# EAGLE board picoKey_230406 (EAGLE 9.6.2)
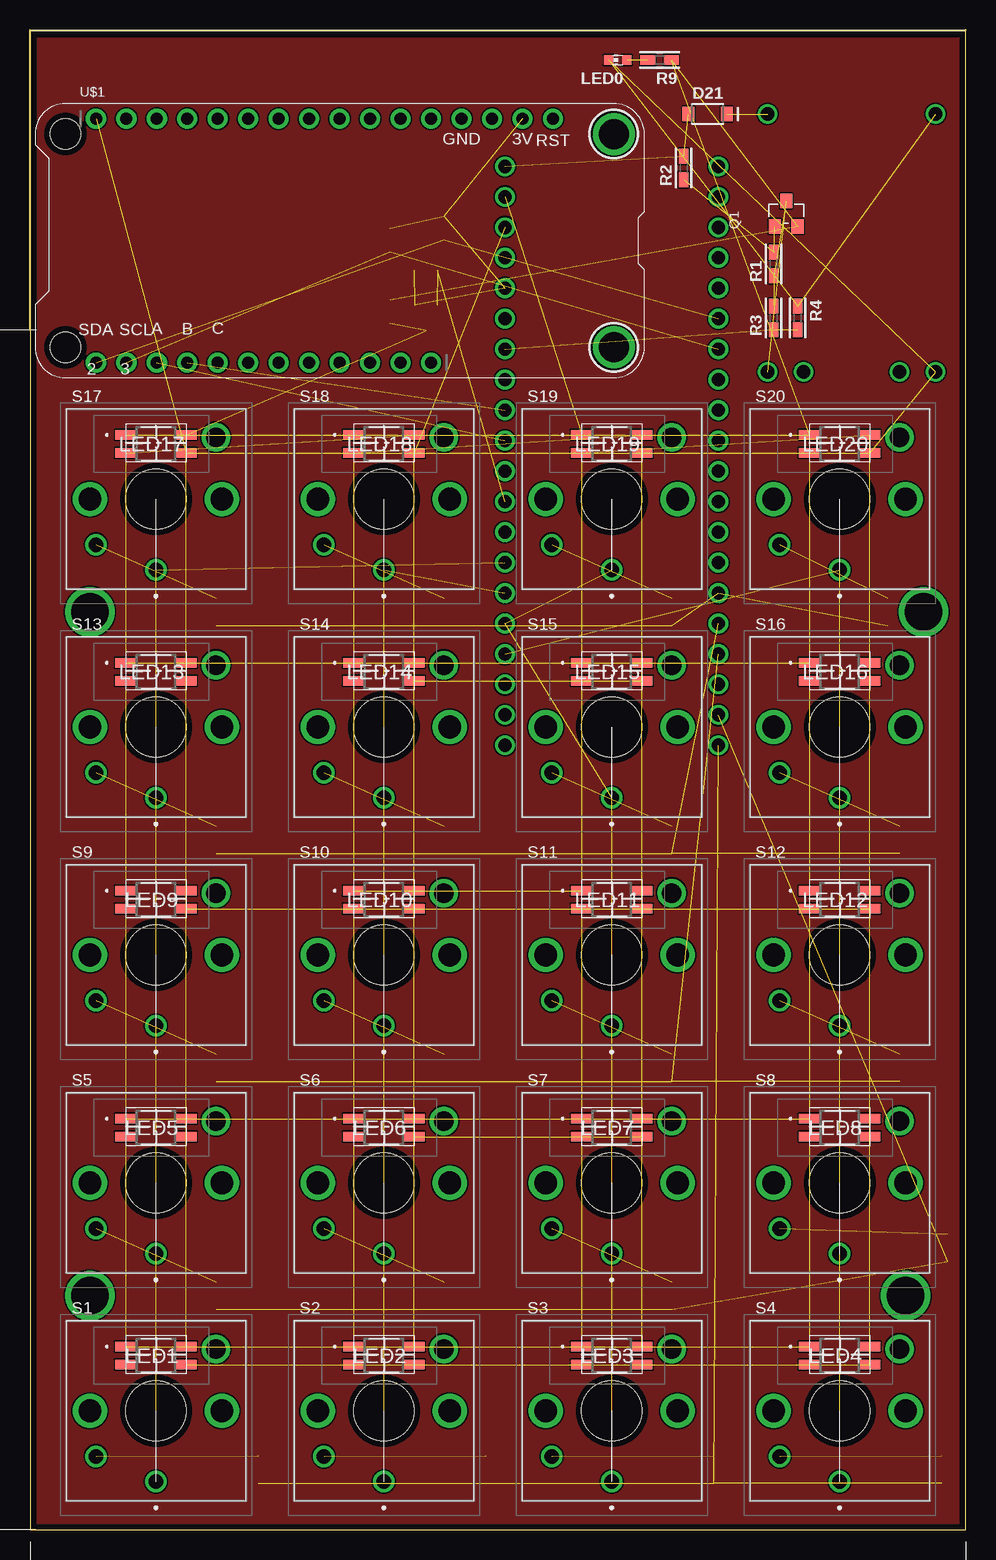
[diagram p0: board, top side]
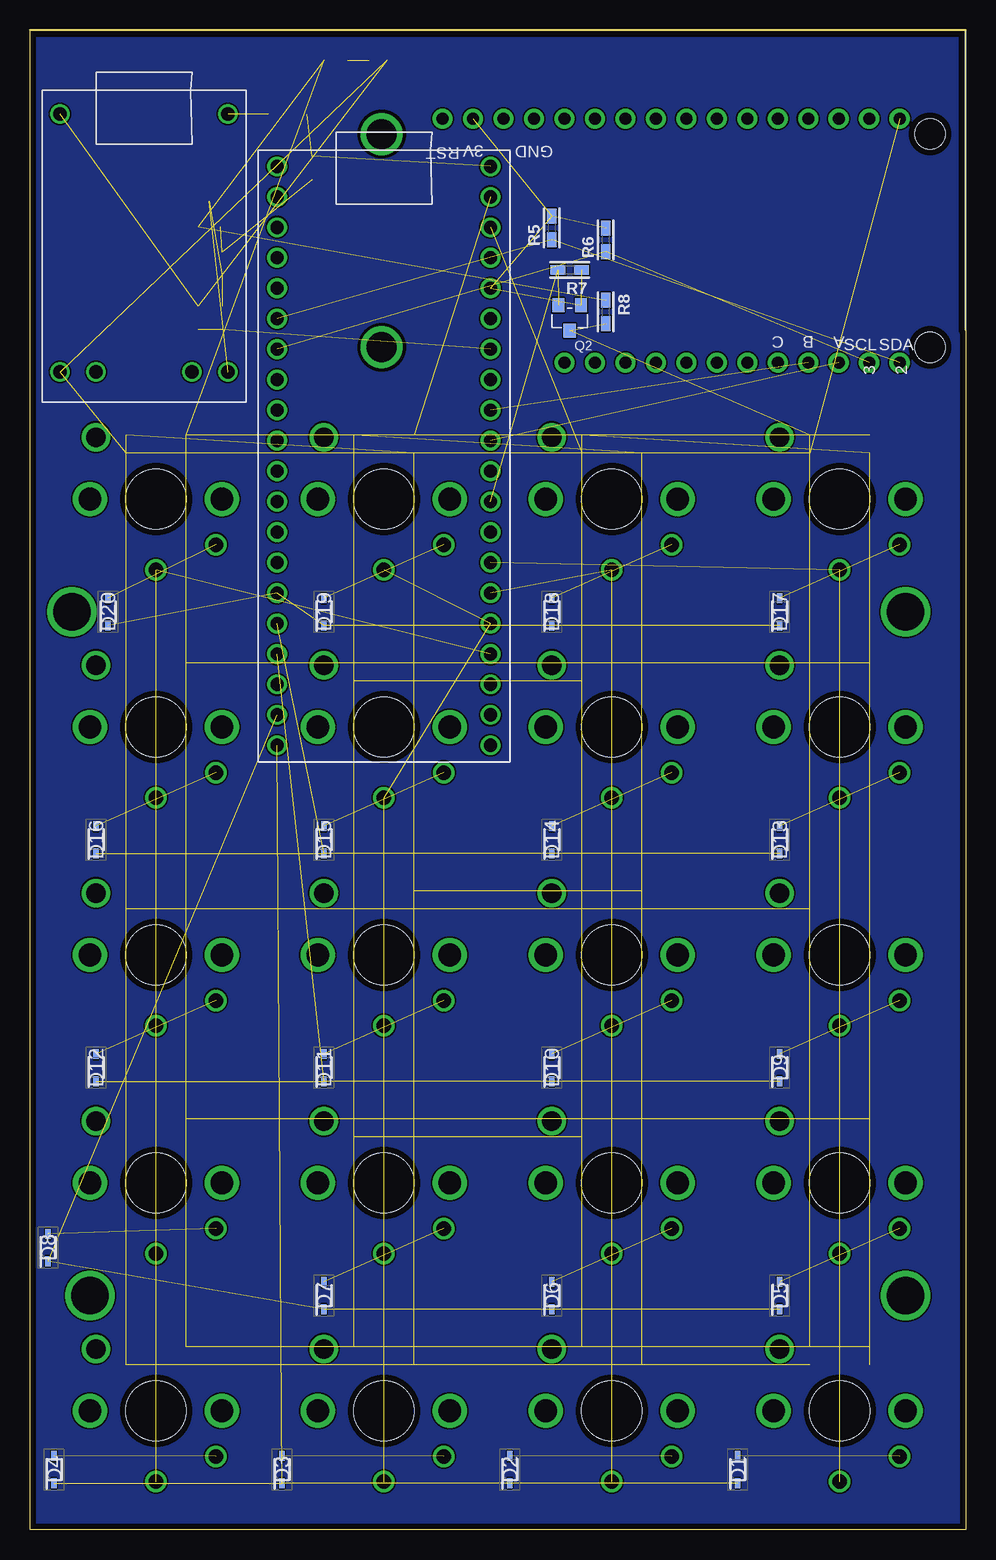
[diagram p1: board, bottom side, seen from below]

Size 78 x 125 mm. Coordinates in mm from the lower left corner, seen from the top.
Outline: 0,0 78,0 78,125 0,125 0,100 0,0
Copper layers (1*16): Top 0.035mm / dielectric 1.53mm / Bottom 0.035mm
Design rules "pban_5mil-l2": minimum track width 5mil, minimum drill 0.3mm, track to track 5mil, track to pad 0.229mm, pad to pad 5mil, via to via 5mil, smd to smd 5mil, copper to edge 0.5mm, drill to drill 0.5mm, minimum pad ring 0.15mm, minimum via ring 0.15mm, stop-mask expansion 4mil, vias tented up to drill 0.35mm, thermal gap 10mil

## Footprints (pad centres in the part's own frame; a part is rotated, then mirrored left to right if it is on the bottom)
SODFL2512X90N = smd 0.82 x 0.42: 1 -1.15,0; 2 1.15,0
SOD-123 = smd 1.2 x 1: A 0,-1.6; K 0,1.6
CHIP-LED0603 = smd 0.8 x 0.8: A 0,-0.75; C 0,0.75
SK6812MINIE = smd 1.8 x 0.82: 1 -2.5,0.75; 2 -2.5,-0.75; 3 2.5,-0.75; 4 2.5,0.75
SOT-23 = smd 1.016 x 1.2: 1 0.95,-1.06; 2 0,1.06; 3 -0.95,-1.06
R0603 = smd 1.25 x 0.8: 1 -0.965,0; 2 0.965,0
KAILH_CHOC_V2 = drill 1.2: 1 0,0; 2 -5,2.1 | drill 1.6: MH1 5,11.05 | drill 1.9: MH2 5.5,5.9; MH3 -5.5,5.9 | hole 5: 0,5.9
CHG-4056 = drill 1.1 pad 1.6: BAT+ 4,-10.5; BAT- -4,-10.5; IN+ 7,11; IN- -7,11; OUT+ 7,-10.5; OUT- -7,-10.5
FEATHER_WING_OLED = drill 1 pad 1.676: 1 0,0; 2 -2.54,0; 3 -5.08,0; 4 -7.62,0; 5 -10.16,0; 6 -12.7,0; 7 -15.24,0; 8 -17.78,0; 9 -20.32,0; 10 -22.86,0; 11 -25.4,0; 12 -27.94,0; 13 -30.48,0; 14 -33.02,0; 15 -35.56,0; 16 -38.1,0; 17 -27.94,20.32; 18 -25.4,20.32; 19 -22.86,20.32; 20 -20.32,20.32; 21 -17.78,20.32; 22 -15.24,20.32; 23 -12.7,20.32; 24 -10.16,20.32; 25 -7.62,20.32; 26 -5.08,20.32; 27 -2.54,20.32; 28 0,20.32 | drill 2.5 pad 3.2: P$1 -43.18,19.05; P$2 -43.18,1.27 | hole 2.54: 2.54,19.05; 2.54,1.27
RASPBERRYPI_PICO_RPI_PICO_MY = drill 1.1 pad 1.6: 3V3 8.89,13.97; 3V3_EN 8.89,16.51; ADC_VREF 8.89,11.43; AGND 8.89,6.35; GND@1 -8.89,19.05; GND@2 -8.89,6.35; GND@3 -8.89,-6.35; GND@4 -8.89,-19.05; GND@6 8.89,-19.05; GND@7 8.89,-6.35; GND@8 8.89,19.05; GP0 -8.89,24.13; GP1 -8.89,21.59; GP2 -8.89,16.51; GP3 -8.89,13.97; GP4 -8.89,11.43; GP5 -8.89,8.89; GP6 -8.89,3.81; GP7 -8.89,1.27; GP8 -8.89,-1.27; GP9 -8.89,-3.81; GP10 -8.89,-8.89; GP11 -8.89,-11.43; GP12 -8.89,-13.97; GP13 -8.89,-16.51; GP14 -8.89,-21.59; GP15 -8.89,-24.13; GP16 8.89,-24.13; GP17 8.89,-21.59; GP18 8.89,-16.51; GP19 8.89,-13.97; GP20 8.89,-11.43; GP21 8.89,-8.89; GP22 8.89,-3.81; GP26_A0 8.89,1.27; GP27_A1 8.89,3.81; GP28_A2 8.89,8.89; RUN 8.89,-1.27; VBUS 8.89,24.13; VSYS 8.89,21.59

## Placement (x,y rotation side)
D1  1N4148WS  [SODFL2512X90N]  19,5 90 bottom
D2  1N4148WS  [SODFL2512X90N]  38,5 90 bottom
D3  1N4148WS  [SODFL2512X90N]  57,5 90 bottom
D4  1N4148WS  [SODFL2512X90N]  76,5 90 bottom
D5  1N4148WS  [SODFL2512X90N]  15.5,19.5 90 bottom
D6  1N4148WS  [SODFL2512X90N]  34.5,19.5 90 bottom
D7  1N4148WS  [SODFL2512X90N]  53.5,19.5 90 bottom
D8  1N4148WS  [SODFL2512X90N]  76.5,23.5 90 bottom
D9  1N4148WS  [SODFL2512X90N]  15.5,38.5 90 bottom
D10  1N4148WS  [SODFL2512X90N]  34.5,38.5 90 bottom
D11  1N4148WS  [SODFL2512X90N]  53.5,38.5 90 bottom
D12  1N4148WS  [SODFL2512X90N]  72.5,38.5 90 bottom
D13  1N4148WS  [SODFL2512X90N]  15.5,57.5 90 bottom
D14  1N4148WS  [SODFL2512X90N]  34.5,57.5 90 bottom
D15  1N4148WS  [SODFL2512X90N]  53.5,57.5 90 bottom
D16  1N4148WS  [SODFL2512X90N]  72.5,57.5 90 bottom
D17  1N4148WS  [SODFL2512X90N]  15.5,76.5 90 bottom
D18  1N4148WS  [SODFL2512X90N]  34.5,76.5 90 bottom
D19  1N4148WS  [SODFL2512X90N]  53.5,76.5 90 bottom
D20  1N4148WS  [SODFL2512X90N]  71.5,76.5 90 bottom
D21  [SOD-123]  56.5,118 270 top
LED0  [CHIP-LED0603]  49,122.5 90 top
LED1  SK6812MINI-E  [SK6812MINIE]  10.5,14.5 0 top
LED2  SK6812MINI-E  [SK6812MINIE]  29.5,14.5 0 top
LED3  SK6812MINI-E  [SK6812MINIE]  48.5,14.5 0 top
LED4  SK6812MINI-E  [SK6812MINIE]  67.5,14.5 0 top
LED5  SK6812MINI-E  [SK6812MINIE]  10.5,33.5 0 top
LED6  SK6812MINI-E  [SK6812MINIE]  29.5,33.5 0 top
LED7  SK6812MINI-E  [SK6812MINIE]  48.5,33.5 0 top
LED8  SK6812MINI-E  [SK6812MINIE]  67.5,33.5 0 top
LED9  SK6812MINI-E  [SK6812MINIE]  10.5,52.5 0 top
LED10  SK6812MINI-E  [SK6812MINIE]  29.5,52.5 0 top
LED11  SK6812MINI-E  [SK6812MINIE]  48.5,52.5 0 top
LED12  SK6812MINI-E  [SK6812MINIE]  67.5,52.5 0 top
LED13  SK6812MINI-E  [SK6812MINIE]  10.5,71.5 0 top
LED14  SK6812MINI-E  [SK6812MINIE]  29.5,71.5 0 top
LED15  SK6812MINI-E  [SK6812MINIE]  48.5,71.5 0 top
LED16  SK6812MINI-E  [SK6812MINIE]  67.5,71.5 0 top
LED17  SK6812MINI-E  [SK6812MINIE]  10.5,90.5 0 top
LED18  SK6812MINI-E  [SK6812MINIE]  29.5,90.5 0 top
LED19  SK6812MINI-E  [SK6812MINIE]  48.5,90.5 0 top
LED20  SK6812MINI-E  [SK6812MINIE]  67.5,90.5 0 top
Q1  [SOT-23]  63.05,109.68 0 top
Q2  [SOT-23]  33,101 180 bottom
R1  100k  [R0603]  62,105.5 90 top
R2  100R  [R0603]  54.5,113.5 90 top
R3  200k  [R0603]  62,101 90 top
R4  100k  [R0603]  64,101 270 top
R5  4.7k  [R0603]  34.5,108.5 90 bottom
R6  4.7k  [R0603]  30,107.5 90 bottom
R7  100k  [R0603]  33,105 180 bottom
R8  100k  [R0603]  30,101.5 270 bottom
R9  1k  [R0603]  52.5,122.5 180 top
S1  CPG135001D02V2  [KAILH_CHOC_V2]  10.5,4 0 top
S2  CPG135001D02V2  [KAILH_CHOC_V2]  29.5,4 0 top
S3  CPG135001D02V2  [KAILH_CHOC_V2]  48.5,4 0 top
S4  CPG135001D02V2  [KAILH_CHOC_V2]  67.5,4 0 top
S5  CPG135001D02V2  [KAILH_CHOC_V2]  10.5,23 0 top
S6  CPG135001D02V2  [KAILH_CHOC_V2]  29.5,23 0 top
S7  CPG135001D02V2  [KAILH_CHOC_V2]  48.5,23 0 top
S8  CPG135001D02V2  [KAILH_CHOC_V2]  67.5,23 0 top
S9  CPG135001D02V2  [KAILH_CHOC_V2]  10.5,42 0 top
S10  CPG135001D02V2  [KAILH_CHOC_V2]  29.5,42 0 top
S11  CPG135001D02V2  [KAILH_CHOC_V2]  48.5,42 0 top
S12  CPG135001D02V2  [KAILH_CHOC_V2]  67.5,42 0 top
S13  CPG135001D02V2  [KAILH_CHOC_V2]  10.5,61 0 top
S14  CPG135001D02V2  [KAILH_CHOC_V2]  29.5,61 0 top
S15  CPG135001D02V2  [KAILH_CHOC_V2]  48.5,61 0 top
S16  CPG135001D02V2  [KAILH_CHOC_V2]  67.5,61 0 top
S17  CPG135001D02V2  [KAILH_CHOC_V2]  10.5,80 0 top
S18  CPG135001D02V2  [KAILH_CHOC_V2]  29.5,80 0 top
S19  CPG135001D02V2  [KAILH_CHOC_V2]  48.5,80 0 top
S20  CPG135001D02V2  [KAILH_CHOC_V2]  67.5,80 0 top
U1  CHG-4056  [CHG-4056]  68.5,107 0 bottom
U$1  FEATHER_WING_OLED  [FEATHER_WING_OLED]  5.5,117.6 180 top
X1  [RASPBERRYPI_PICO_RPI_PICO_MY]  48.5,89.5 0 bottom

## Library data of the parts
D1-D20 = SamacSys_Parts; ARROW_PART_NUMBER: 1N4148WS; ARROW_PRICE-STOCK: https://www.arrow.com/en/products/1n4148ws/on-semiconductor?region=europe; DESCRIPTION: ON Semiconductor Switching Diode, 300mA 75V, 2-Pin SOD-323 1N4148WS; HEIGHT: 0.9mm; MANUFACTURER_NAME: onsemi; MANUFACTURER_PART_NUMBER: 1N4148WS; MOUSER_PART_NUMBER: 512-1N4148WS; MOUSER_PRICE-STOCK: https://www.mouser.co.uk/ProductDetail/onsemi-Fairchild/1N4148WS?qs=2%2FYqgE%252BHg%252BKBrKZlAsMLhw%3D%3D
D21 LED0 Q1 Q2 R1-R9 = Miya_IC
LED1-LED20 = picoKey; DESCRIPTION: 3.2x2.8x1.78 mm 0.2W Intelligent external control surface mount SMD LED (MSL:5a); HEIGHT: 1.88mm; MANUFACTURER_NAME: Yellow Stone Corp.; MANUFACTURER_PART_NUMBER: SK6812MINI-E
S1-S20 U1 U$1 X1 = picoKey

## Nets
3V3: Q2.3 R5.2 R6.2 R7.1 U$1.15 X1.3V3
A_BTN: U$1.26 X1.GP26_A0
AD2: R3.1 R4.2 X1.GP28_A2
B_BTN: U$1.25 X1.GP27_A1
C_BTN: U$1.24
COL1: S1.1 S5.1 S9.1 S13.1 S17.1 X1.GP21
COL2: S2.1 S6.1 S10.1 S14.1 S18.1 X1.GP20
COL3: S3.1 S7.1 S11.1 S15.1 S19.1 X1.GP19
COL4: S4.1 S8.1 S12.1 S16.1 S20.1 X1.GP18
GND: LED0.C LED1.3 LED2.3 LED3.3 LED4.3 LED5.3 LED6.3 LED7.3 LED8.3 LED9.3 LED10.3 LED11.3 LED12.3 LED13.3 LED14.3 LED15.3 LED16.3 LED17.3 LED18.3 LED19.3 LED20.3 R4.1 U1.IN- U1.OUT- U$1.1 X1.GND@8
LED: Q2.1 R7.2 X1.GP22
LED1: LED1.4 LED5.4 LED9.4 LED13.4 LED17.4 Q2.2 R8.2
N$5: D1.2 S1.2
N$6: D2.2 S2.2
N$7: D3.2 S3.2
N$8: D4.2 S4.2
N$9: D5.2 S5.2
N$10: D6.2 S6.2
N$11: D7.2 S7.2
N$12: D8.2 S8.2
N$13: D9.2 S9.2
N$14: D10.2 S10.2
N$15: D11.2 S11.2
N$16: D12.2 S12.2
N$17: D13.2 S13.2
N$18: D14.2 S14.2
N$19: D15.2 S15.2
N$20: D16.2 S16.2
N$21: D17.2 S17.2
N$22: D18.2 S18.2
N$23: LED0.A R9.2
N$24: D20.2 S20.2
N$25: D19.2 S19.2
N$26: LED2.2 LED3.4 LED6.2 LED7.4 LED10.2 LED11.4 LED14.2 LED15.4 LED18.2 LED19.4
N$27: LED3.2 LED4.4 LED7.2 LED8.4 LED11.2 LED12.4 LED15.2 LED16.4 LED19.2 LED20.4
N$29: Q1.2 R1.1 R3.2 U1.OUT+
N$30: D21.A R2.2 X1.VBUS
N$31: LED1.2 LED2.4 LED5.2 LED6.4 LED9.2 LED10.4 LED13.2 LED14.4 LED17.2 LED18.4
N$32: D21.K U1.IN+
N$33: LED4.2
N$34: LED8.2
N$35: LED12.2
N$36: Q1.3 R1.2 R2.1
N$37: LED16.2
N$38: LED20.2
N$40: X1.ADC_VREF
N$41: X1.GP10
ROW1: D1.1 D2.1 D3.1 D4.1 X1.GP15
ROW2: D5.1 D6.1 D7.1 D8.1 X1.GP14
ROW3: D9.1 D10.1 D11.1 D12.1 X1.GP13
ROW4: D13.1 D14.1 D15.1 D16.1 X1.GP12
ROW5: D17.1 D18.1 D19.1 D20.1 X1.GP11
RX: X1.GP1
SCL: R6.1 U$1.27 X1.GP5
SDA: R5.1 U$1.28 X1.GP4
TX: X1.GP0
VSYS: LED1.1 LED2.1 LED3.1 LED4.1 LED5.1 LED6.1 LED7.1 LED8.1 LED9.1 LED10.1 LED11.1 LED12.1 LED13.1 LED14.1 LED15.1 LED16.1 LED17.1 LED18.1 LED19.1 LED20.1 Q1.1 R8.1 R9.1 X1.VSYS

## Tracks (layer width: path | path; a pad name or v marks a point on that pad's centre or on a via)
3V3  (5 unrouted)
A_BTN  (1 unrouted)
AD2  (2 unrouted)
B_BTN  (1 unrouted)
COL1  (5 unrouted)
COL2  (5 unrouted)
COL3  (5 unrouted)
COL4  (5 unrouted)
GND  (25 unrouted)
LED  (2 unrouted)
LED1  (6 unrouted)
N$1  (via drill 3.1)
  other vias: 5,19.5
N$2  (via drill 3.1)
  other vias: 73,19.5
N$3  (via drill 3.1)
  other vias: 5,76.5
N$4  (via drill 3.1)
  other vias: 74.5,76.5
N$5  (1 unrouted)
N$6  (1 unrouted)
N$7  (1 unrouted)
N$8  (1 unrouted)
N$9  (1 unrouted)
N$10  (1 unrouted)
N$11  (1 unrouted)
N$12  (1 unrouted)
N$13  (1 unrouted)
N$14  (1 unrouted)
N$15  (1 unrouted)
N$16  (1 unrouted)
N$17  (1 unrouted)
N$18  (1 unrouted)
N$19  (1 unrouted)
N$20  (1 unrouted)
N$21  (1 unrouted)
N$22  (1 unrouted)
N$23  (1 unrouted)
N$24  (1 unrouted)
N$25  (1 unrouted)
N$26  (9 unrouted)
N$27  (9 unrouted)
N$28
  pour Top: 0,0 0,125 78,125 78,0
  pour Bottom: 78,0 78,125 0,125 0,0
N$29  (3 unrouted)
N$30  (2 unrouted)
N$31  (9 unrouted)
N$32  (1 unrouted)
N$36  (2 unrouted)
ROW1  (4 unrouted)
ROW2  (4 unrouted)
ROW3  (4 unrouted)
ROW4  (4 unrouted)
ROW5  (4 unrouted)
SCL  (2 unrouted)
SDA  (2 unrouted)
VSYS  (23 unrouted)